# Altium PCB CNY.PcbDoc
Units mm, origin at the board's own origin, x right, y up, seen from the top; angles counter-clockwise.
Board outline 52 x 7 mm, 2 copper layers (Top Layer, Bottom Layer); 7 components, 6 nets, 20 pads, 0 vias.
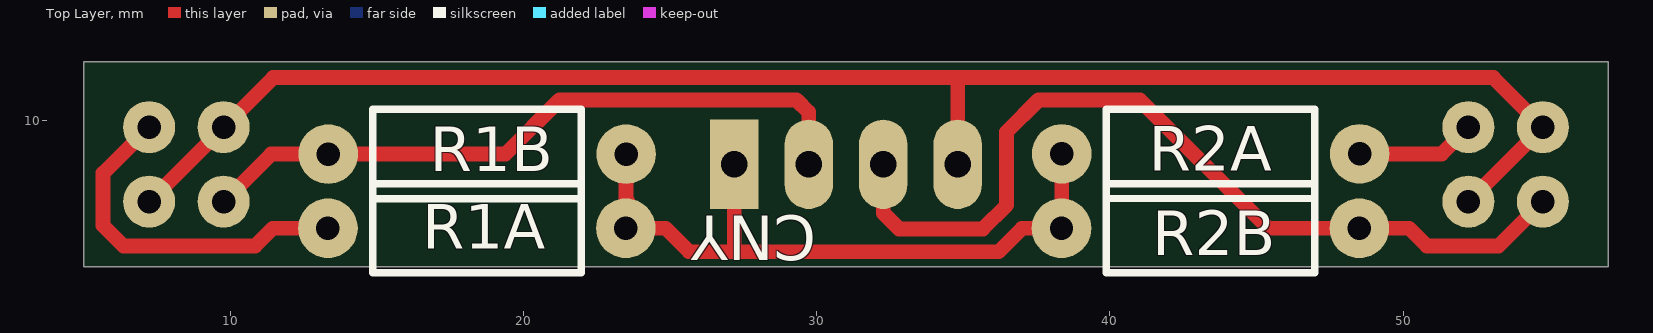
[diagram p0: Top Layer view]
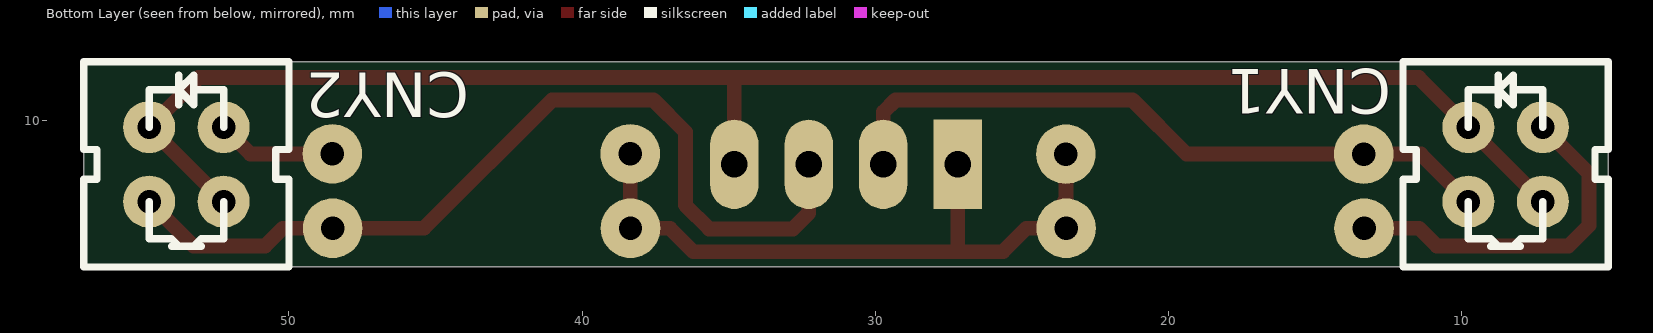
[diagram p1: Bottom Layer view, seen from below]
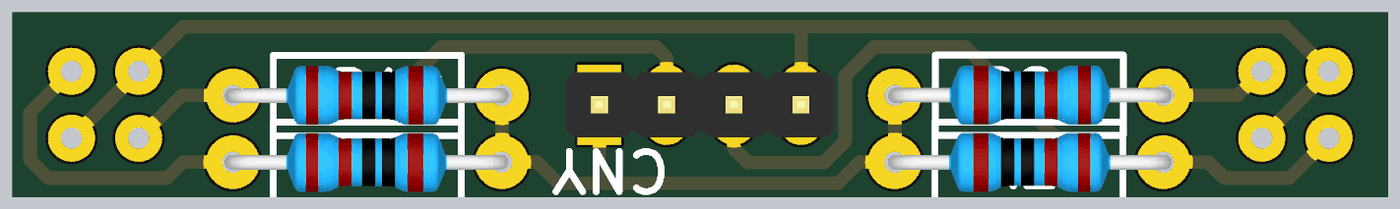
[diagram p2: 3D render of the assembled board from above, using the file's embedded part models]

## Layer stack, top to bottom
Top Solder: solder mask 0.0102, Solder Resist, Dk 3.5
Top Layer: signal copper 0.0356
Dielectric 1: dielectric 0.32, FR-4, Dk 4.8
Bottom Layer: signal copper 0.0356
Bottom Solder: solder mask 0.0102, Solder Resist, Dk 3.5

## Board outline
5,5 5,12 57,12 57,5

## Design rules (kind name [scope] priority, off if disabled: settings)
Clearance [All] p1: gap=0.254
PolygonConnect [All] p1: connectstyle=Relief reliefconductorwidth=0.254 reliefentries=4 polygonreliefangle="90 Angle" airgapwidth=0.254
RoutingVias [All] p1: holewidth=0.711 width=1.27 viastyle="Through Hole" minholewidth=0.711 minwidth=1.27 maxholewidth=0.711 maxwidth=1.27
SolderMaskExpansion [All] p1: expansion=0.102
Width [All] p1: maxlimit=0.508 minlimit=0.508 preferedwidth=0.508
30 further rules are at their usual default settings.

## Components (designator, comment, footprint, x,y, rotation, side; value= is the part's Value field where it differs from the comment)
CNY "Header 1x4" "HEADER 1X4" 31,8.5 r90 top
CNY1 "CNY70" CNY70_LIB 8.5,8.5 r270 bottom
CNY2 "CNY70" CNY70_LIB 53.5,8.5 r270 bottom
R1A "RES" RES-Axial-400mil 13.33,6.32 r0 top
R1B "RES" RES-Axial-400mil 13.34,8.85 r0 top
R2A "RES" RES-Axial-400mil 48.52,8.86 r180 top
R2B "RES" RES-Axial-400mil 48.51,6.32 r180 top

## Footprints (in the part's own frame and the unit in brackets; to place one, negate y for a bottom-side part, rotate by r counter-clockwise, add the part's x,y. Pads: shape width x height; smd on the part's side, far side on the other; paste and mask are expansions set on the pad)
CNY70_LIB [mil]
  round 70 hole 31.5: A(-50,50) C(50,-50) E(50,50) K(-50,-50)
  silkscreen extent -138,-138 138,138
"HEADER 1X4" [mil]
  rect 120x65 hole 35.43: 1(0,150)
  oval 120x65 hole 35.43: 2(0,50) 3(0,-50) 4(0,-150)
  body extent -49,-200 49,200, height 336
RES-Axial-400mil [mil]
  round 80 hole 31.5: 1(0,0) 2(400,0)
  silkscreen extent 60,-60 340,60, body extent -12,-44 410,44, height 94

## Nets (pads, with @x,y where several pads share a name; then routed paths per layer and width w, separated by ;. In a path a pad name is that pad's centre, name@x,y a point inside that pad or via, vN(x,y) a via of type N, cw(c..) or ccw(c..) an arc to the next point about the centre after c; other vN are vias at no path point)
CNY1: CNY1.C CNY.2 R1B.1 | length 23.3
  Top Layer w0.508: CNY1.C 11.39,8.85 R1B.1 19.38,8.85 21.228,10.698 29.312,10.698 29.73,10.28 CNY.2
CNY2: CNY2.C CNY.3 R2B.1 | length 30.4
  Top Layer w0.508: CNY.3 32.27,6.84 32.81,6.3 35.67,6.3 36.48,7.11 36.48,9.61 37.568,10.698 41.022,10.698 45.4,6.32 R2B.1 50.21,6.32 50.81,5.72 53.26,5.72 CNY2.C
GND: CNY1.E CNY1.K CNY2.E CNY2.K CNY.4 | length 56.5
  Top Layer w0.508: CNY1.E CNY1.K 11.46,11.46 34.81,11.46 ; CNY.4 34.81,11.46 ; CNY2.E CNY2.K 53.08,11.46 34.81,11.46
NetCNY1_A: CNY1.A R1A.1 | length 12.2
  Top Layer w0.508: CNY1.A 5.66,8.2 5.66,6.41 6.35,5.72 10.85,5.72 11.45,6.32 R1A.1
NetCNY2_A: CNY2.A R2A.1 | length 4.1
  Top Layer w0.508: R2A.1 51.32,8.86 CNY2.A
VCC: CNY.1 R1A.2 R1B.2 R2A.2 R2B.2 | length 23.6
  Top Layer w0.508: R1A.2 24.85,6.32 25.65,5.52 27.19,5.52 ; R1A.2@23.5,7.24 R1B.2 ; R1A.2@23.54,7.24 23.55,7.25 R1A.2@23.55,6.34 ; CNY.1 27.19,5.52 ; R2B.2 37.01,6.32 36.21,5.52 27.19,5.52 ; R2B.2@38.36,6.33 R2B.2@38.36,7.23 ; R2A.2 R2B.2@38.36,7.23 ; R2B.2@38.37,7.24 R2B.2@38.36,7.23

## Silkscreen, mask and mechanical layers (free items; w line width, h text height)
Mechanical 1:
  the board outline again, w0.254